# Altium PCB JacdacBreadboardRingsWasherG 109 D-shaped.PcbDoc
Units mm, origin at the board's own origin, x right, y up, seen from the top; angles counter-clockwise.
Board outline 7.5 x 27.99 mm, 2 copper layers (Top Layer, Bottom Layer), stack 1.525 mm thick; 12 components, 3 nets, 49 pads, 0 vias.
Unrouted connection lines stored in the file: 12.
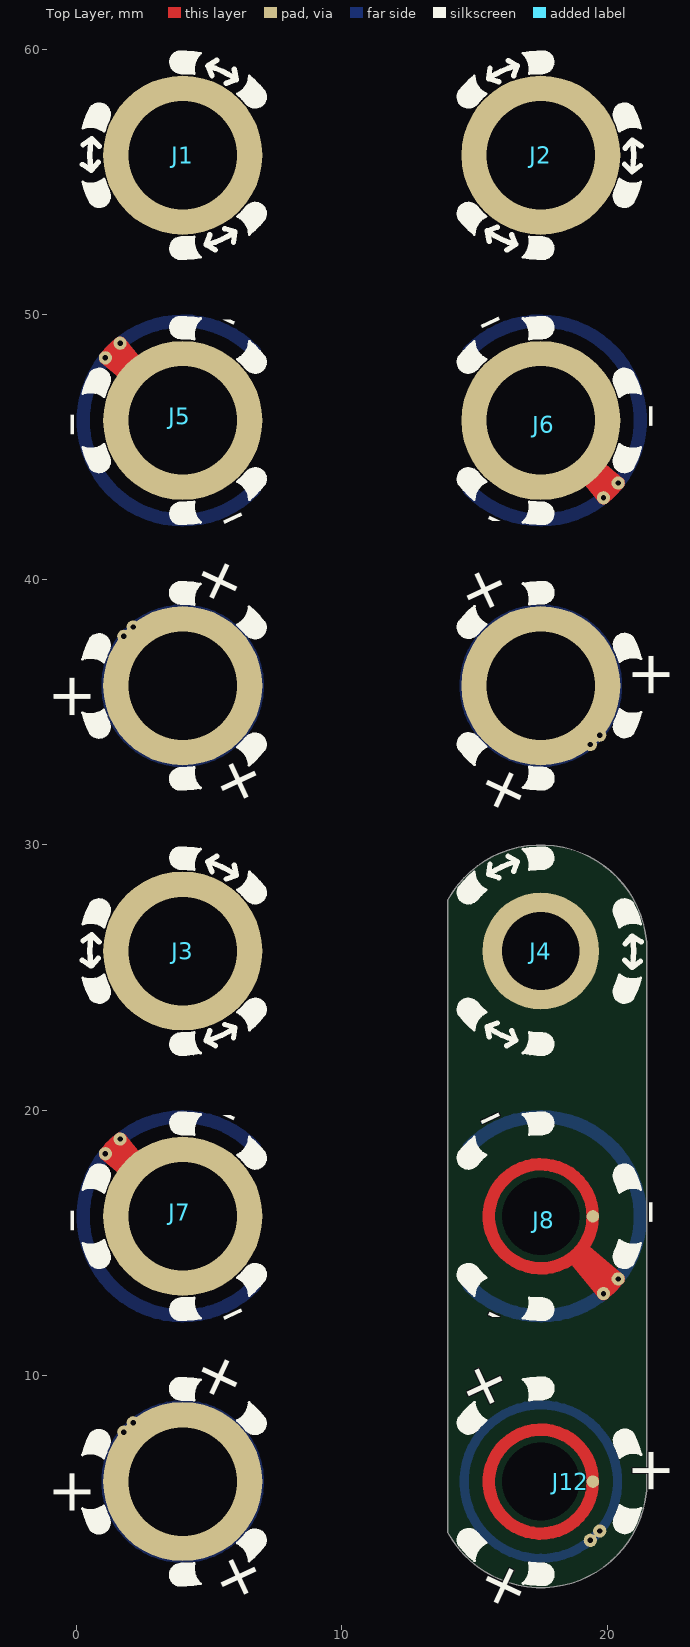
[diagram p0: Top Layer view]
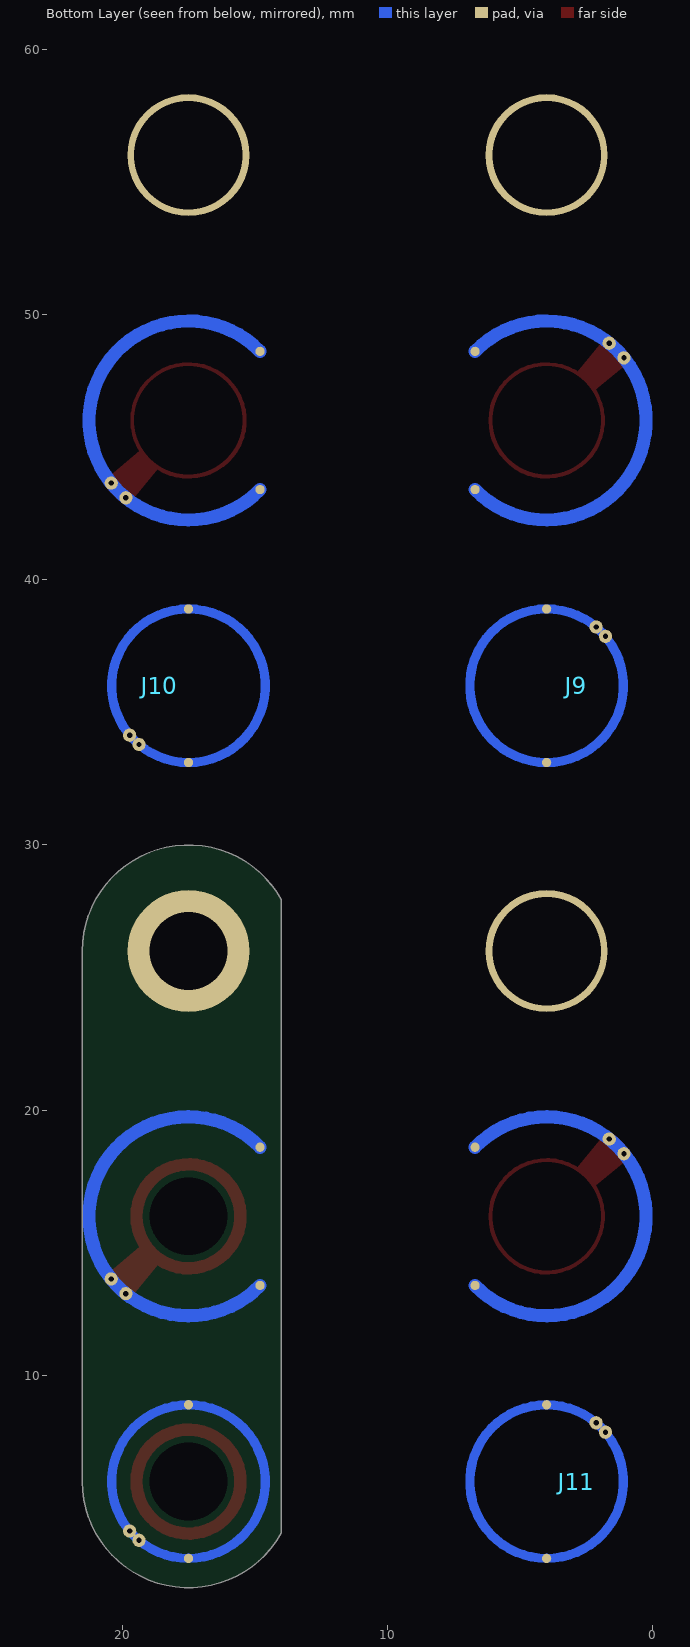
[diagram p1: Bottom Layer view, seen from below]

## Layer stack, top to bottom
Top Solder: solder mask 0.0102, Solder Resist, Dk 3.5
Top Layer: signal copper 0.0356
Dielectric 1: core 1.454, FR-4, Dk 4.2
Bottom Layer: signal copper 0.0356
Bottom Solder: solder mask 0.0102, Solder Resist, Dk 3.5

## Board outline
14,4.064 14,27.936 cw(c17.5,26) 21.5,26 21.5,6 cw(c17.5,6)

## Design rules (kind name [scope] priority, off if disabled: settings)
AssemblyTestPointUsage [All] p1: valid=2
BoardOutlineClearance [All] p1: gap=0.3 ignorepadtopadclearanceinfootprint=FALSE except(0: Arc-OutlineEdge Arc-SplitContinuation Track-OutlineEdge Track-SplitContinuation SMDPad-OutlineEdge SMDPad-SplitContinuation THPad-OutlineEdge THPad-SplitContinuation Via-OutlineEdge Via-SplitContinuation Fill-SplitContinuation Poly-SplitContinuation Region-OutlineEdge Region-SplitContinuation Text-OutlineEdge Text-SplitContinuation; 0.2: Fill-OutlineEdge Poly-OutlineEdge Region-CavityEdge Region-CutoutEdge Region-SplitBarrior Text-CavityEdge Text-CutoutEdge Text-SplitBarrior)
Clearance [All] p1: gap=0.13 ignorepadtopadclearanceinfootprint=FALSE
ComponentClearance MH5.0KeepoutaAreaClearance [InComponent('MH1') or InComponent('MH2')  or InComponent('MH3') or InComponent('MH4') vs InComponent('D6') or InComponent('D7') or InComponent('D8') or InComponent('D9') or InComponent('D10') or InComponent('D11') or InComponent('D12') or InComponent('D13') or InComponent('C6') or InComponent('C7') or InComponent('C8')  or  InComponent('C9') or  InComponent('C12')] p1: gap=0 collisioncheckmode=3 verticalgap=0 showdistances=FALSE
ComponentClearance [All] p2: gap=0.2 collisioncheckmode=3 verticalgap=0.2 showdistances=FALSE
DiffPairsRouting [All] p1: maxlimit=2 minlimit=0.15 mostfreqgap=0.15 toplayer_minwidth=0.15 toplayer_maxwidth=2 toplayer_prefwidth=0.15 bottomlayer_minwidth=0.15 bottomlayer_maxwidth=2 bottomlayer_prefwidth=0.15 maxuncoupledlength=25
FabricationTestPointUsage [All] p1: valid=2 allowmultiple=FALSE
HoleSize [All] p1: absolutevalues=TRUE maxlimit=5 minlimit=0.15 maxpercent=80.000 minpercent=20.000
HoleToHoleClearance [All] p1: gap=0.2 allowstackedmicrovias=TRUE
MinimumSolderMaskSliver [All] p1: minsoldermaskwidth=0.005
PlaneClearance [All] p1: clearance=0.2
PlaneConnect [All] p1: planeconnectstyle=Relief reliefexpansion=0.5 reliefentries=4 reliefconductorwidth=0.2 reliefairgap=0.3
PolygonConnect [All] p1: connectstyle=Direct reliefconductorwidth=0.2 reliefentries=4 polygonreliefangle="90 Angle" airgapwidth=0.2
RoutingVias RoutingVias_Power [InNetClass('Power')] p1: holewidth=0.4 width=0.8 viastyle="Through Hole" minholewidth=0.3 minwidth=0.6 maxholewidth=0.4 maxwidth=1
RoutingVias [All] p2: holewidth=0.3 width=0.6 viastyle="Through Hole" minholewidth=0.3 minwidth=0.6 maxholewidth=0.3 maxwidth=0.8
SilkToSilkClearance [All] p1: silktosilkclearance=0.001
SilkToSolderMaskClearance [IsPad] p1: minsilkscreentomaskgap=0.05 clearancetoexposedcopper=TRUE
SolderMaskExpansion [All] p1: expansion=0.075 istentingtop=FALSE
UnRoutedNet [All] p1: checkbadconnections=TRUE
ViasUnderSMD [not ( HasFootprint('JACDAC_EDGE_CONNECTOR_NO_TRACES') or HasFootprint('JACDAC_EDGE_CONNECTOR_NO_TRACES_CABLE_GUIDE') )] p1: allowed=FALSE
Width Width_Power [InNetClass('Power')] p1: maxlimit=1 minlimit=0.2 preferedwidth=0.5
Width [All] p2: maxlimit=1 minlimit=0.13 preferedwidth=0.13 minimp=50.000000 maximp=50.000000 favimp=50.000000
18 further rules are at their usual default settings.

## Components (designator, comment, footprint, x,y, rotation, side; value= is the part's Value field where it differs from the comment)
J1 "Jacdac EC30 1mm-bush-washer JD_DATA" "jacdac ec30-8 1mm-bush-washer-d pin1" 4,56 r180 top
J2 "Jacdac EC30 4mm-bush-washer JD_DATA" "jacdac ec30-8 4mm-bush-washer-d pin1" 17.5,56 r0 top
J3 "Jacdac EC30 8mm-bush-washer JD_DATA" "jacdac ec30-8 8mm-bush-washer-d pin1" 4,26 r180 top
J4 "Jacdac EC30 fr4-washer JD_DATA" "jacdac ec30-8 fr4-washer-d pin1" 17.5,26 r0 top
J5 "Jacdac EC30 1mm-bush-washer GND" "JACDAC EC30-8 1MM-BUSH-WASHER-D PIN2 JLC" 4,46 r180 top
J6 "Jacdac EC30 4mm-bush-washer GND" "jacdac ec30-8 4mm-bush-washer-d pin2 jlc" 17.5,46 r0 top
J7 "Jacdac EC30 8mm-bush-washer GND" "jacdac ec30-8 8mm-bush-washer-d pin2 jlc" 4,16 r180 top
J8 "Jacdac EC30 fr4-washer GND" "jacdac ec30-8 fr4-washer-d pin2 jlc" 17.5,16 r0 top
J9 "Jacdac EC30 1mm-bush-washer JD_PWR" "jacdac ec30-8 1mm-bush-washer-d pin3 jlc" 4,36 r180 top
J10 "Jacdac EC30 4mm-bush-washer JD_PWR" "jacdac ec30-8 4mm-bush-washer-d pin3 jlc" 17.5,36 r0 top
J11 "Jacdac EC30 8mm-bush-washer JD_PWR" "jacdac ec30-8 8mm-bush-washer-d pin3 jlc" 4,6 r180 top
J12 "Jacdac EC30 fr4-washer JD_PWR" "jacdac ec30-8 fr4-washer-d pin3 jlc" 17.5,6 r0 top

## Footprints (in the part's own frame and the unit in brackets; to place one, negate y for a bottom-side part, rotate by r counter-clockwise, add the part's x,y. Pads: shape width x height; smd on the part's side, far side on the other; paste and mask are expansions set on the pad)
"jacdac ec30-8 1mm-bush-washer-d pin1" [mm]
  round 6 / inner round 0 / far side round 4.6 hole 4.09 mask+0.05: 1(0,0)
  silkscreen extent -3.13,-3.9 3.78,3.9, body extent -3.13,-3.9 3.88,3.9, height 1
"JACDAC EC30-8 1MM-BUSH-WASHER-D PIN2 JLC" [mm]
  round 0.35 smd far side paste-1 mask+0: 2(-2.698,2.605) 2(-2.698,-2.605)
  round 6 / inner round 0 / far side round 0 hole 4.09 unplated mask+0.05: 2(0,0)
  round 0.47 smd paste-1 mask+0: 2(1.96,0)
  round 0.5 hole 0.2 mask+0: 2(2.36,-2.914) 2(2.914,-2.36)
  Top Layer circle w0.47: c0,0 r1.96
  Top Layer lines w0.5: 2.458,-2.512 1.686,-1.334 2.914,-2.36 cw(c0,0) 2.36,-2.914 1.25,-1.561
  Bottom Layer lines w0.5: -2.698,2.605 cw(c0,0) -2.698,-2.605
  silkscreen extent -3.13,-3.9 3.77,3.9, body extent -3.13,-4.01 4,4.01, height 1
"jacdac ec30-8 1mm-bush-washer-d pin3 jlc" [mm]
  round 0.35 smd far side paste-1 mask+0: 3(0,2.895) 3(0,-2.895)
  round 6 / inner round 0 / far side round 0 hole 4.09 unplated mask+0.05: 3(0,0)
  round 0.5 hole 0.2 mask+0: 3(1.865,-2.215) 3(2.219,-1.862)
  Bottom Layer lines w0.35: 0,2.895 ccw(c0,0) 0,-2.895 ccw(c0,0) 0,2.895
  silkscreen extent -3.12,-3.89 3.78,3.91, body extent -3.13,-3.89 4.04,3.91, height 1
"jacdac ec30-8 4mm-bush-washer-d pin1" [mm]
  round 6 / inner round 0 / far side round 4.6 hole 4.09 mask+0.05: 1(0,0)
  silkscreen extent -3.13,-3.9 3.78,3.9, body extent -3.13,-3.9 3.88,3.9, height 4
"jacdac ec30-8 4mm-bush-washer-d pin2 jlc" [mm]
  round 0.35 smd far side paste-1 mask+0: 2(-2.698,-2.605) 2(-2.698,2.605)
  round 6 / inner round 0 / far side round 0 hole 4.09 unplated mask+0.05: 2(0,0)
  round 0.47 smd paste-1 mask+0: 2(1.96,0)
  round 0.5 hole 0.2 mask+0: 2(2.36,-2.914) 2(2.914,-2.36)
  Top Layer circle w0.47: c0,0 r1.96
  Top Layer lines w0.5: 1.25,-1.561 2.36,-2.914 ccw(c0,0) 2.914,-2.36 1.686,-1.334 2.458,-2.512
  Bottom Layer lines w0.5: -2.698,-2.605 ccw(c0,0) -2.698,2.605
  silkscreen extent -3.13,-3.9 3.77,3.9, body extent -3.13,-4.01 4,4.01, height 4
"jacdac ec30-8 4mm-bush-washer-d pin3 jlc" [mm]
  round 0.35 smd far side paste-1 mask+0: 3(0,-2.895) 3(0,2.895)
  round 6 / inner round 0 / far side round 0 hole 4.09 unplated mask+0.05: 3(0,0)
  round 0.5 hole 0.2 mask+0: 3(1.865,-2.215) 3(2.219,-1.862)
  Bottom Layer lines w0.35: 0,-2.895 ccw(c0,0) 0,2.895 ccw(c0,0) 0,-2.895
  silkscreen extent -3.12,-3.89 3.78,3.91, body extent -3.13,-3.89 4.04,3.91, height 4
"jacdac ec30-8 8mm-bush-washer-d pin1" [mm]
  round 6 / inner round 0 / far side round 4.6 hole 4.09 mask+0.05: 1(0,0)
  silkscreen extent -3.13,-3.9 3.78,3.9, body extent -3.13,-3.9 3.88,3.9, height 8
"jacdac ec30-8 8mm-bush-washer-d pin2 jlc" [mm]
  round 0.35 smd far side paste-1 mask+0: 2(-2.698,2.605) 2(-2.698,-2.605)
  round 6 / inner round 0 / far side round 0 hole 4.09 unplated mask+0.05: 2(0,0)
  round 0.47 smd paste-1 mask+0: 2(1.96,0)
  round 0.5 hole 0.2 mask+0: 2(2.36,-2.914) 2(2.914,-2.36)
  Top Layer circle w0.47: c0,0 r1.96
  Top Layer lines w0.5: 2.458,-2.512 1.686,-1.334 2.914,-2.36 cw(c0,0) 2.36,-2.914 1.25,-1.561
  Bottom Layer lines w0.5: -2.698,2.605 cw(c0,0) -2.698,-2.605
  silkscreen extent -3.13,-3.9 3.77,3.9, body extent -3.13,-4.01 4,4.01, height 8
"jacdac ec30-8 8mm-bush-washer-d pin3 jlc" [mm]
  round 0.35 smd far side paste-1 mask+0: 3(0,2.895) 3(0,-2.895)
  round 6 / inner round 0 / far side round 0 hole 4.09 unplated mask+0.05: 3(0,0)
  round 0.5 hole 0.2 mask+0: 3(1.865,-2.215) 3(2.219,-1.862)
  Bottom Layer lines w0.35: 0,2.895 ccw(c0,0) 0,-2.895 ccw(c0,0) 0,2.895
  silkscreen extent -3.12,-3.89 3.78,3.91, body extent -3.13,-3.89 4.04,3.91, height 8
"jacdac ec30-8 fr4-washer-d pin1" [mm]
  round 4.4 / inner round 0 / far side round 4.6 hole 2.93 mask+0: 1(0,0)
  silkscreen extent -3.13,-3.9 3.78,3.9, body extent -3.13,-3.9 3.88,3.9, height 0.01
"jacdac ec30-8 fr4-washer-d pin2 jlc" [mm]
  round 0.35 smd far side paste-1 mask+0: 2(-2.698,-2.605) 2(-2.698,2.605)
  round 0 hole 2.93 unplated mask+0.6: 2(0,0)
  round 0.47 smd paste-1 mask+0: 2(1.96,0)
  round 0.5 hole 0.2 mask+0: 2(2.36,-2.914) 2(2.914,-2.36)
  Top Layer circle w0.47: c0,0 r1.96
  Top Layer lines w0.5: 1.25,-1.561 2.36,-2.914 ccw(c0,0) 2.914,-2.36 1.686,-1.334 2.458,-2.512
  Bottom Layer lines w0.5: -2.698,-2.605 ccw(c0,0) -2.698,2.605
  silkscreen extent -3.13,-3.9 3.77,3.9, body extent -3.13,-4.01 4,4.01, height 0.05
"jacdac ec30-8 fr4-washer-d pin3 jlc" [mm]
  round 0.35 smd far side paste-1 mask+0: 3(0,-2.895) 3(0,2.895)
  round 0 hole 2.93 unplated mask+0.6: 3(0,0)
  round 0.5 hole 0.2 mask+0: 3(1.865,-2.215) 3(2.219,-1.862)
  round 0.47 smd paste-1 mask+0: 3(1.96,0)
  Top Layer circle w0.47: c0,0 r1.96
  Bottom Layer lines w0.35: 0,-2.895 ccw(c0,0) 0,2.895 ccw(c0,0) 0,-2.895
  silkscreen extent -3.12,-3.89 3.78,3.91, body extent -3.13,-3.89 4.04,3.91, height 0.05

## Part data
J1 J5 J9: Supplier Part Number 1=C2916331, Diameter=M3, Standoff Height=1mm, Supplier 1=LCSC
J2 J6 J10: Supplier Part Number 1=C2915635, Diameter=M3, Standoff Height=4mm, Supplier 1=LCSC, Supplier 2=LCSC, Supplier Part Number 2=C2916382
J3 J7 J11: Supplier Part Number 1=C2916369, Diameter=M3, Standoff Height=8mm, Supplier 1=LCSC, Supplier 2=LCSC, Supplier Part Number 2=C2916368
J4 J8 J12: Hole Size=M3

## Nets (pads, with @x,y where several pads share a name; then routed paths per layer and width w, separated by ;. In a path a pad name is that pad's centre, name@x,y a point inside that pad or via, vN(x,y) a via of type N, cw(c..) or ccw(c..) an arc to the next point about the centre after c; other vN are vias at no path point)
GND: J5.2 J6.2 J7.2 J8.2
JD_DATA: J1.1 J2.1 J3.1 J4.1
JD_PWR: J9.3 J10.3 J11.3 J12.3

## Silkscreen, mask and mechanical layers (free items; w line width, h text height)
Alignment:
  the board outline again, w0.2

## Text inside footprints (layer, text, board x,y; h text height)
J5: Top Overlay "-" at 5.484,48.353 h3.5 r335; Top Overlay "-" at 4.848,43.35 h3.5 r205; Top Overlay "-" at 1.24,46.351 h3.5 r90
J6: Top Overlay "-" at 16.016,43.647 h3.5 r155; Top Overlay "-" at 16.652,48.65 h3.5 r25; Top Overlay "-" at 20.26,45.649 h3.5 r270
J7: Top Overlay "-" at 5.484,18.353 h3.5 r335; Top Overlay "-" at 4.848,13.35 h3.5 r205; Top Overlay "-" at 1.24,16.351 h3.5 r90
J8: Top Overlay "-" at 20.26,15.649 h3.5 r270; Top Overlay "-" at 16.652,18.65 h3.5 r25; Top Overlay "-" at 16.016,13.647 h3.5 r155
J9: Top Overlay "+" at 1.084,36.534 h2.8 r90; Top Overlay "+" at 4.745,33.134 h2.8 r205; Top Overlay "+" at 5.718,38.413 h2.8 r335
J10: Top Overlay "+" at 15.782,33.587 h2.8 r155; Top Overlay "+" at 16.755,38.866 h2.8 r25; Top Overlay "+" at 20.416,35.466 h2.8 r270
J11: Top Overlay "+" at 1.084,6.534 h2.8 r90; Top Overlay "+" at 4.745,3.134 h2.8 r205; Top Overlay "+" at 5.718,8.413 h2.8 r335
J12: Top Overlay "+" at 15.782,3.587 h2.8 r155; Top Overlay "+" at 16.755,8.866 h2.8 r25; Top Overlay "+" at 20.416,5.466 h2.8 r270